# Altium PCB 4CH_PT100_INPUT_ISO.PcbDoc
Units mm, origin at the board's own origin, x right, y up, seen from the top; angles counter-clockwise.
Board outline 70 x 50 mm, 4 copper layers (Top Layer, Layer 1, Layer 2, Bottom Layer), stack 1.58 mm thick; 83 components, 55 nets, 291 pads, 100 vias.
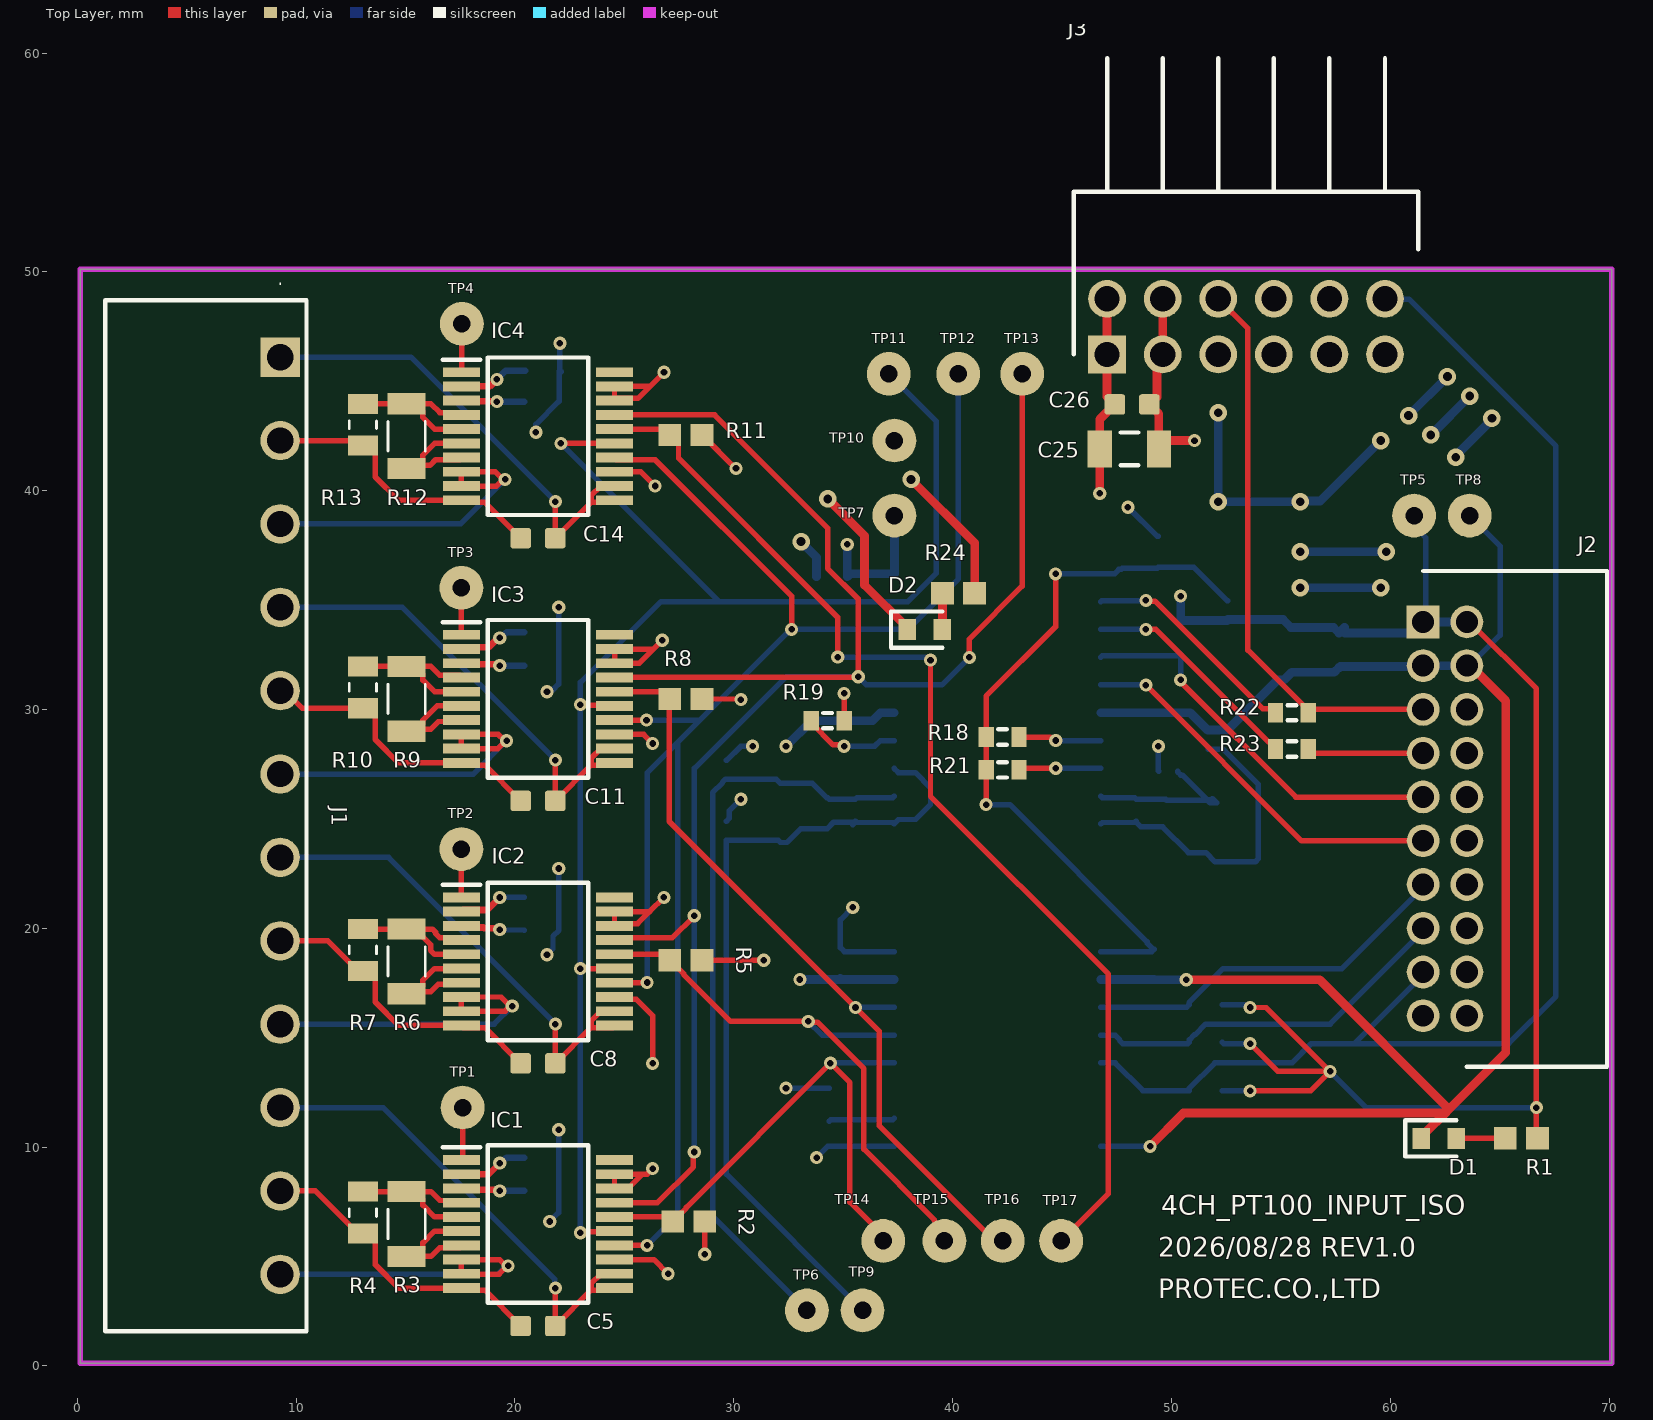
[diagram p0: Top Layer view]
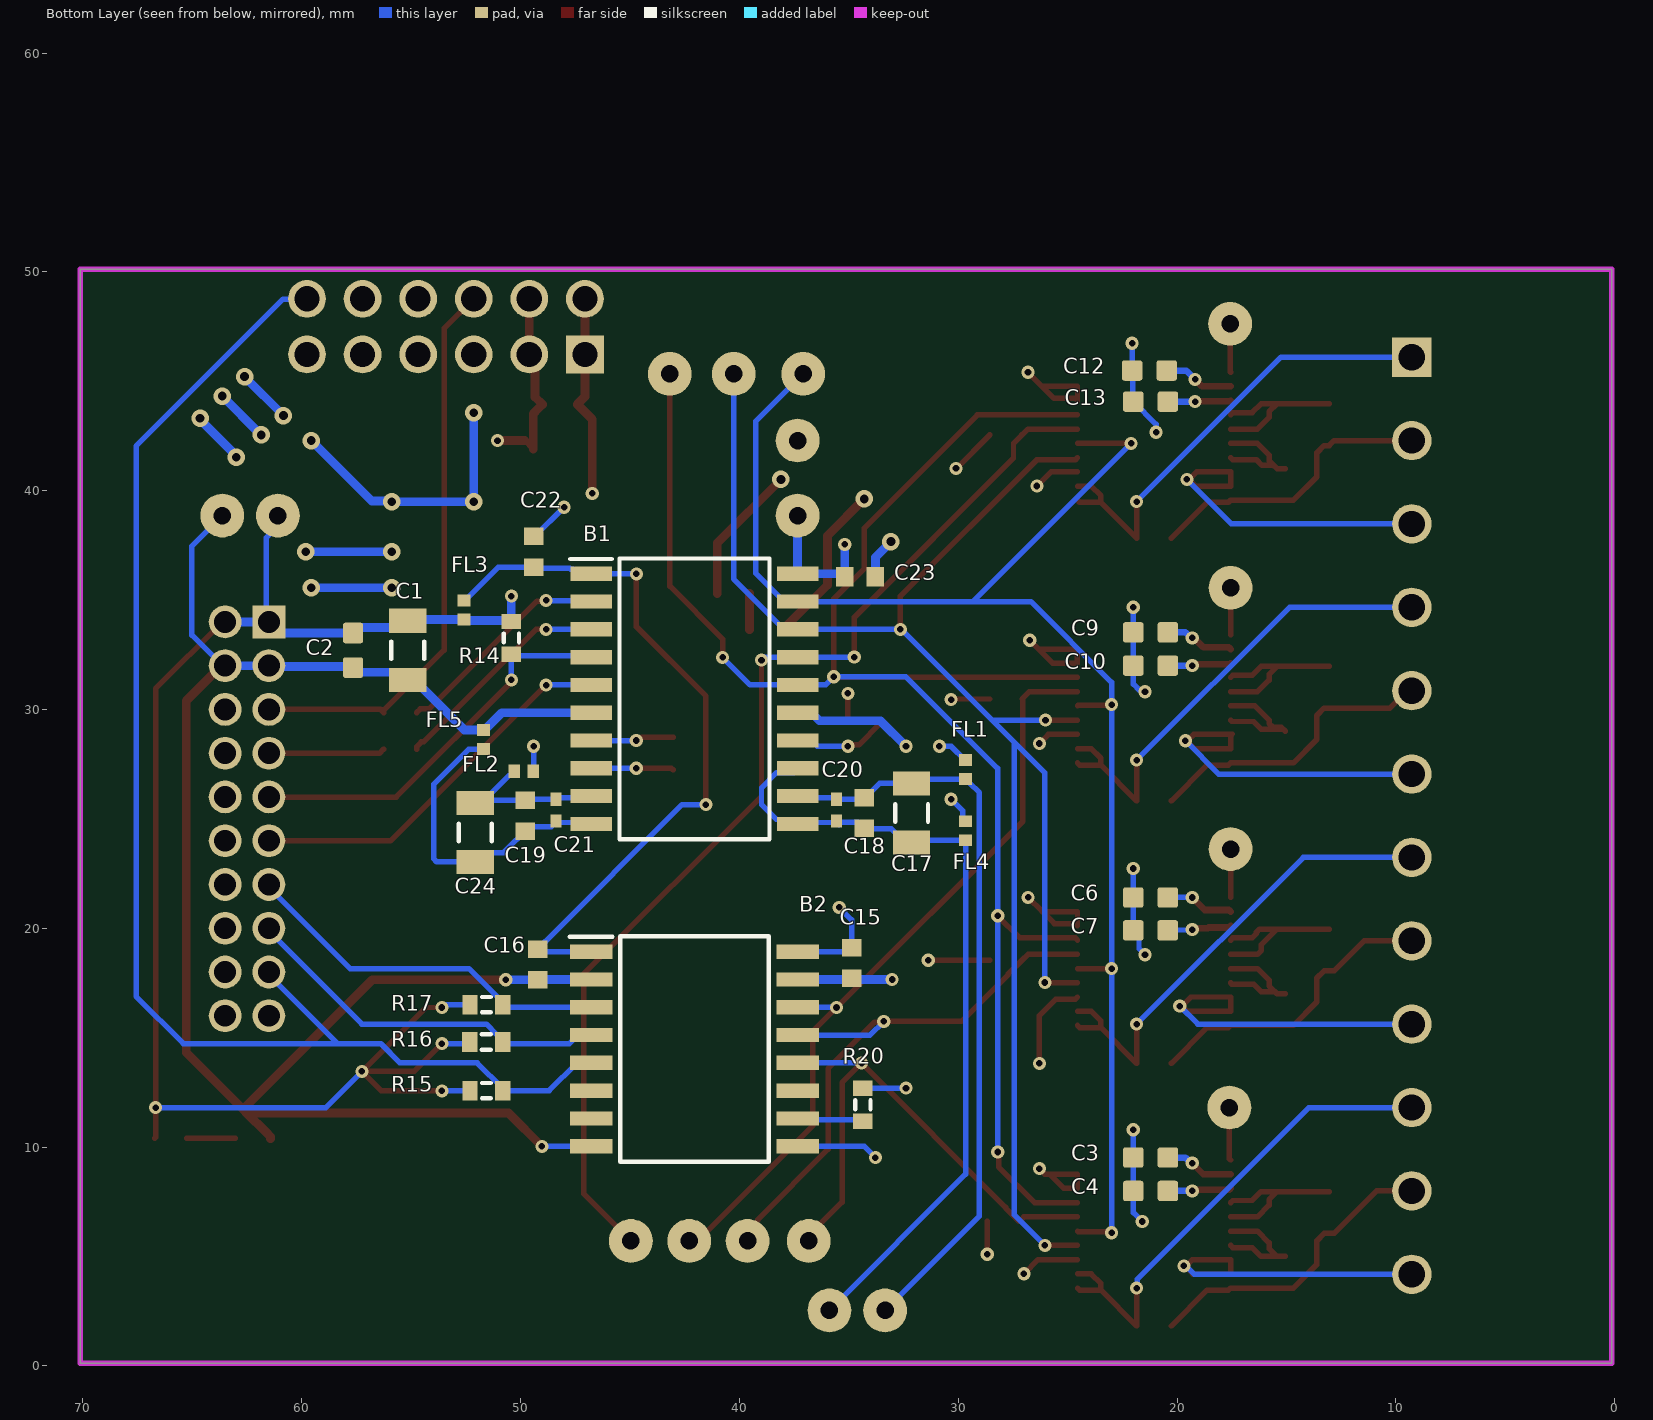
[diagram p1: Bottom Layer view, seen from below]
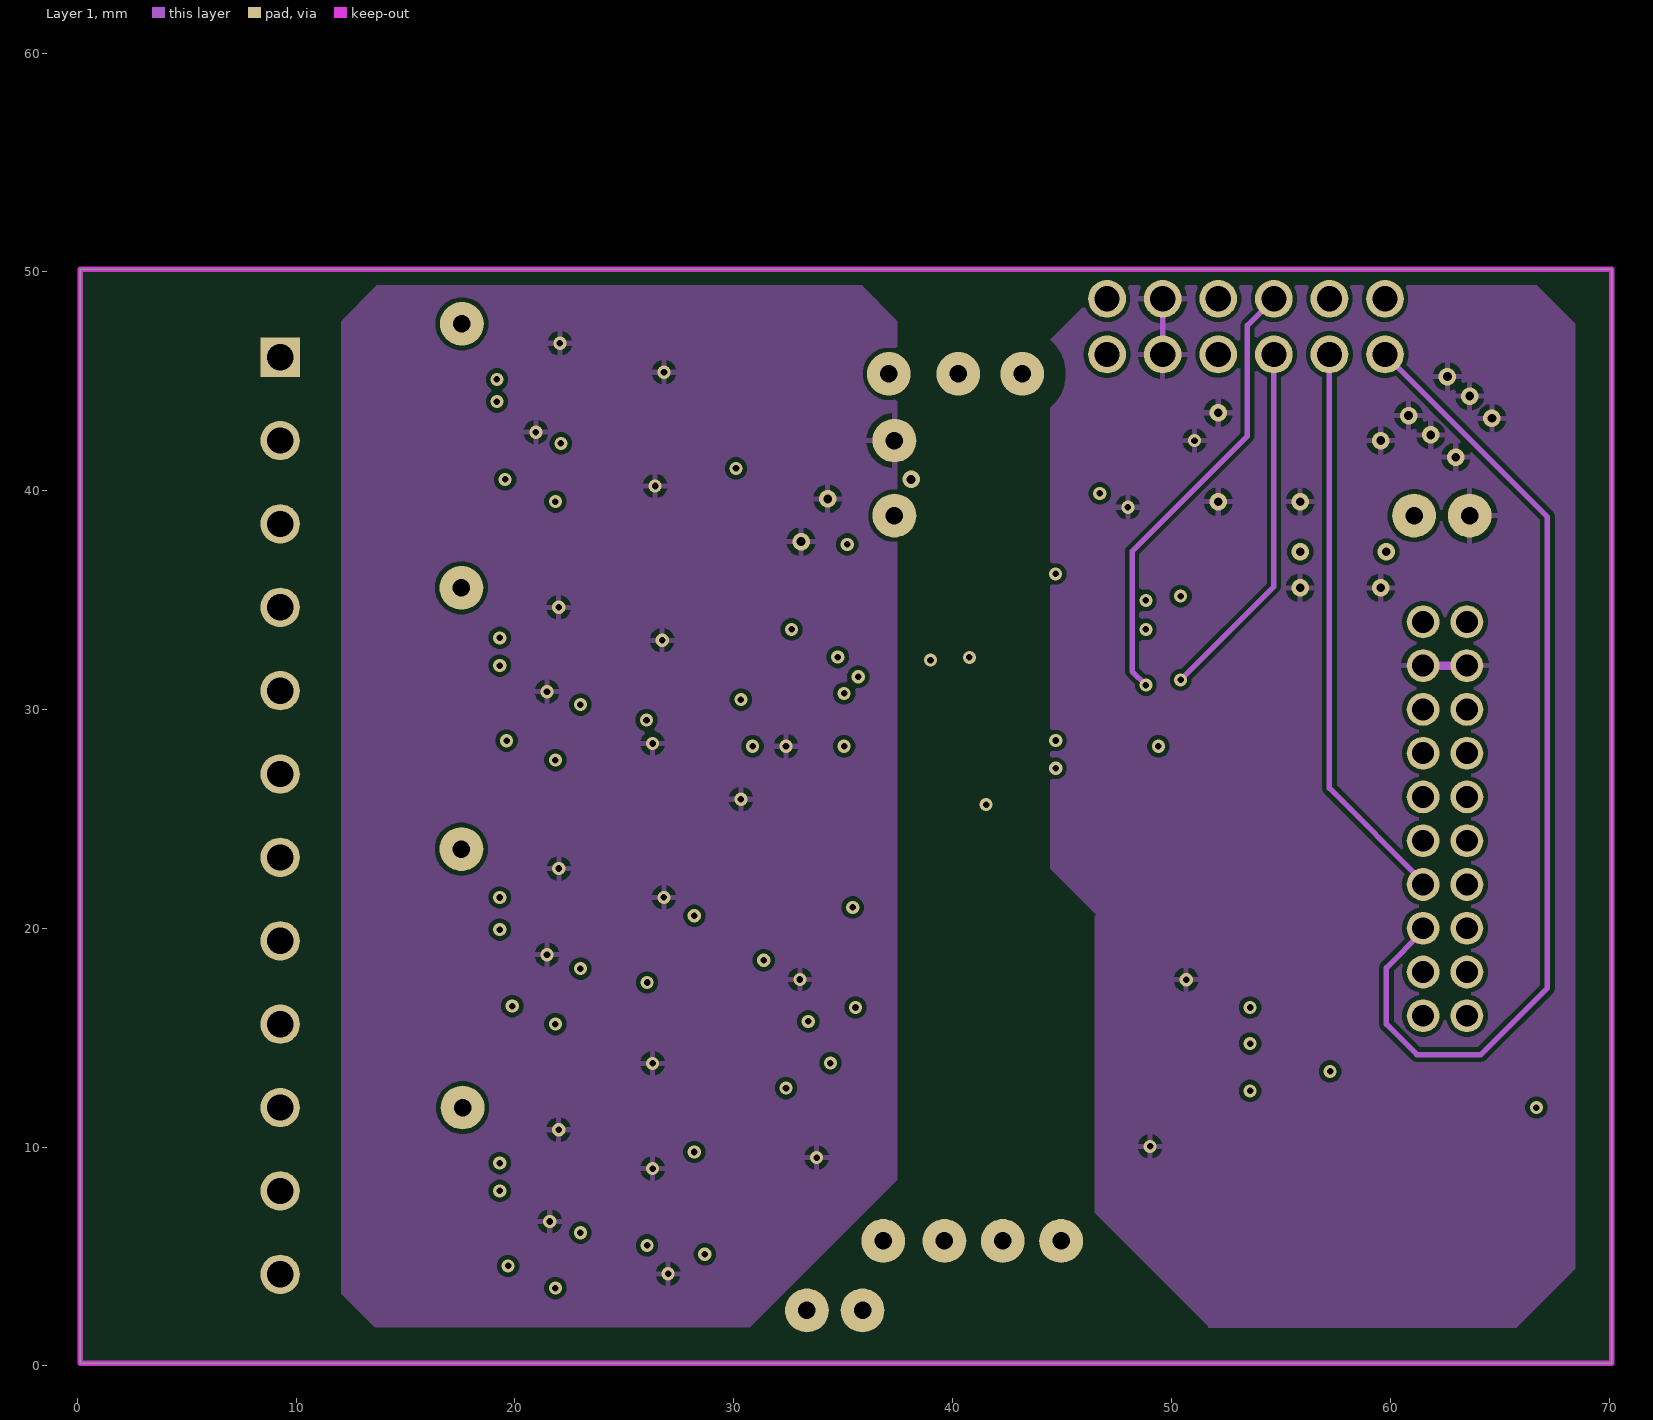
[diagram p2: Layer 1]
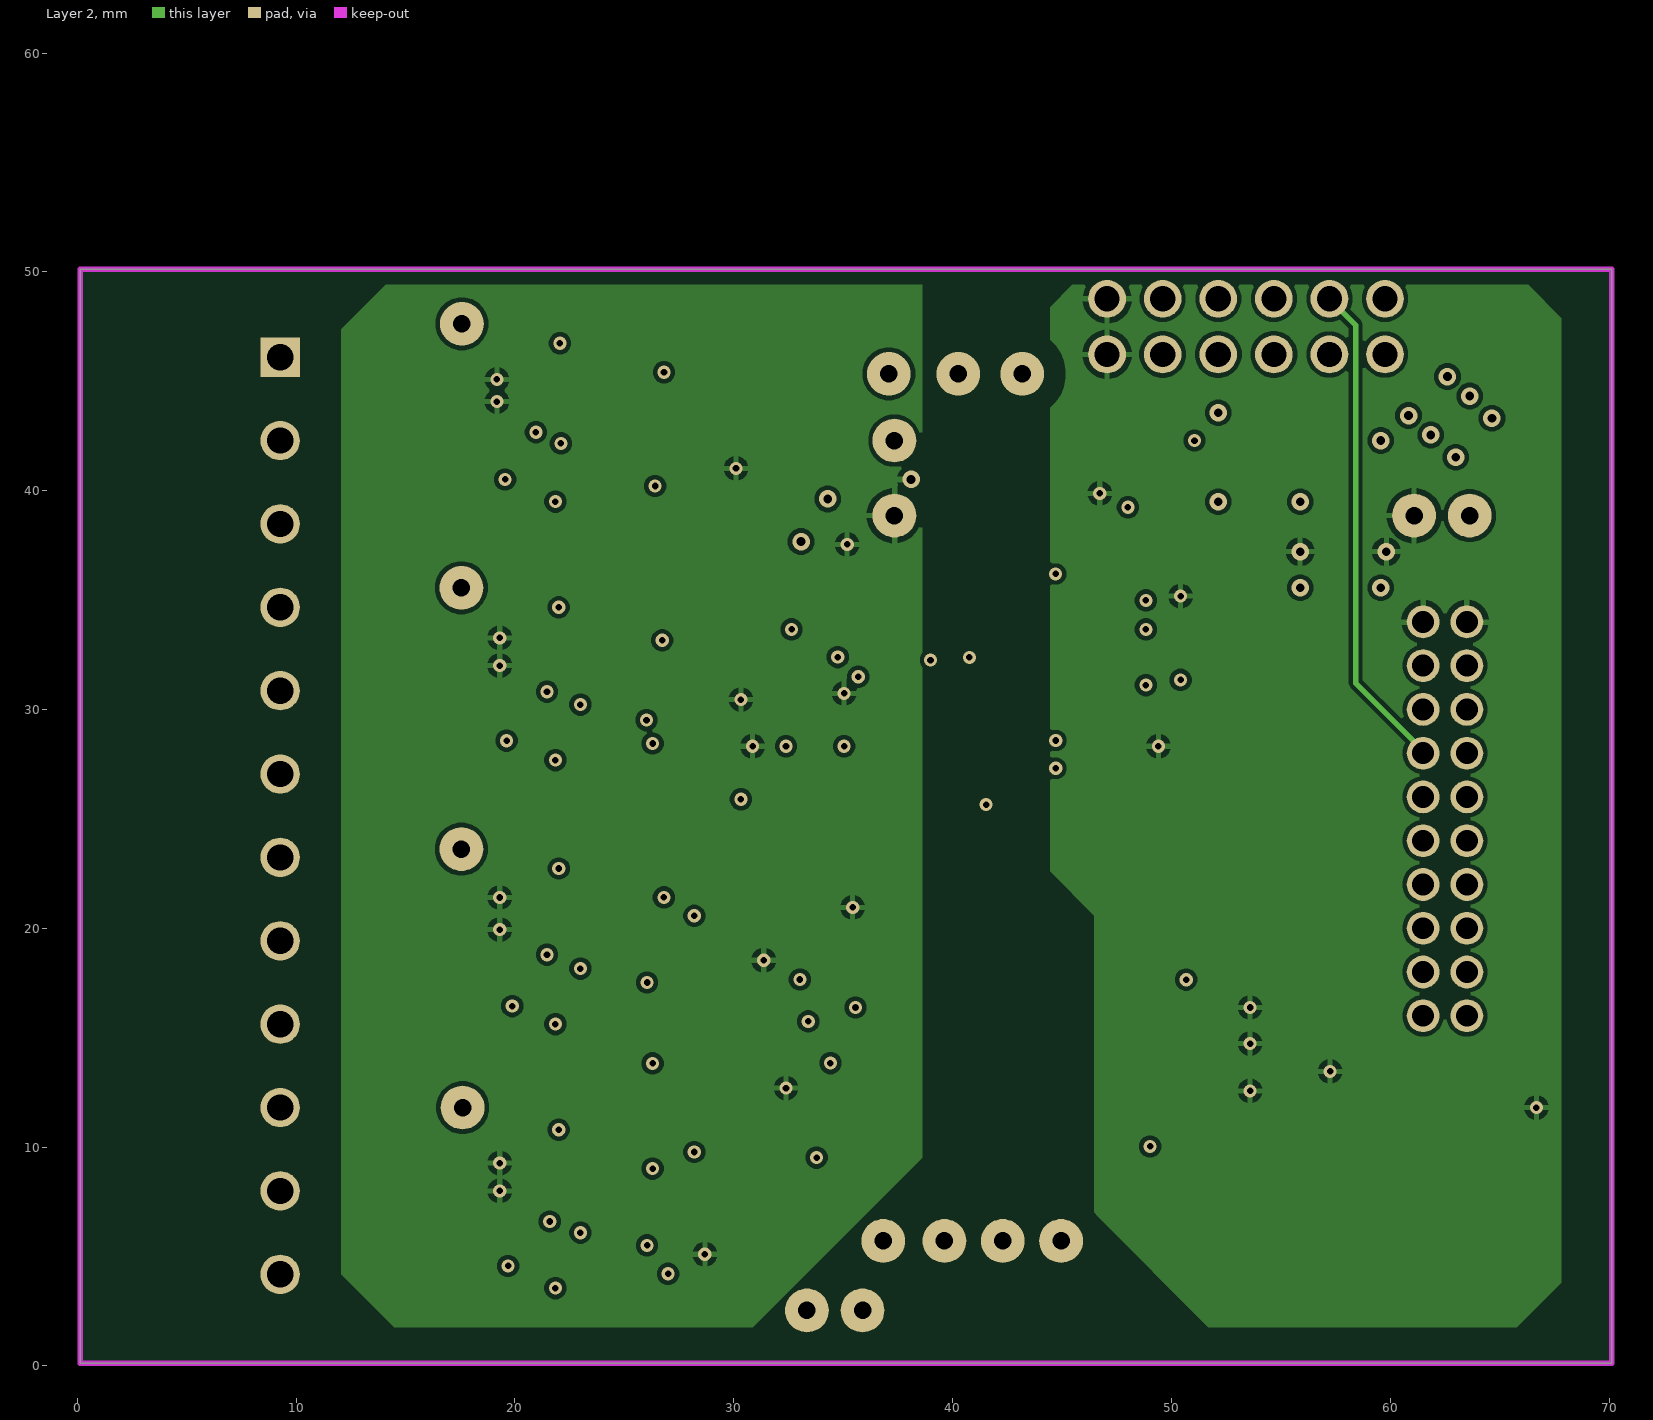
[diagram p3: Layer 2]
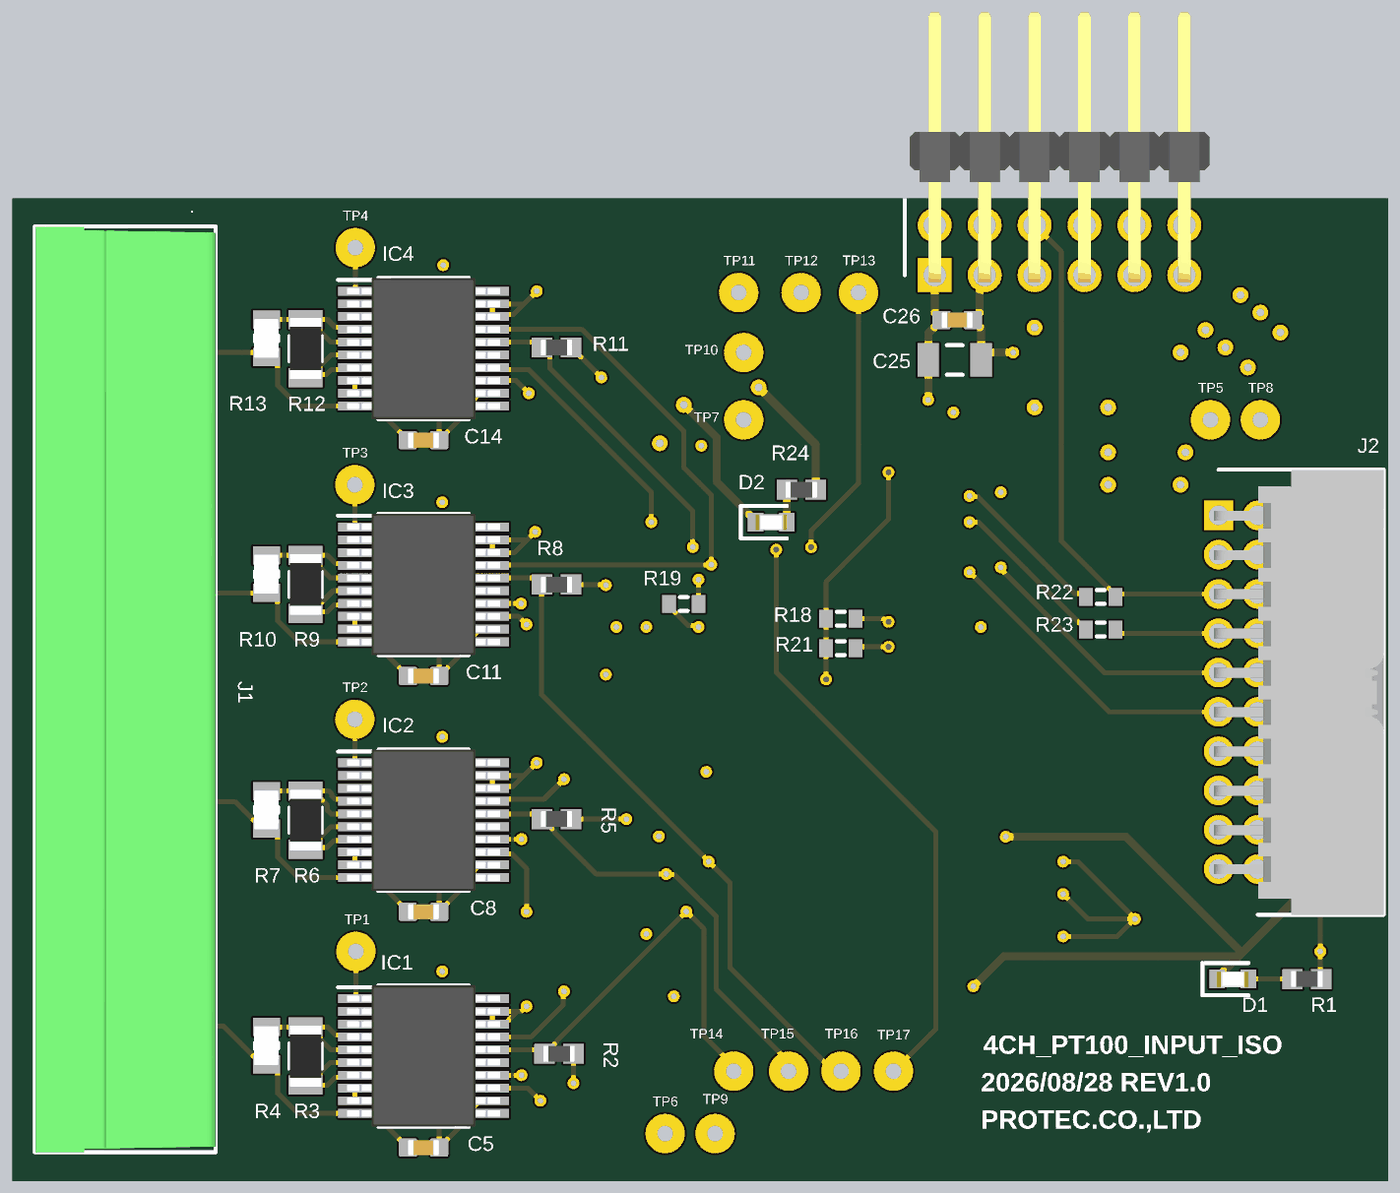
[diagram p4: 3D render of the assembled board from above, using the file's embedded part models]
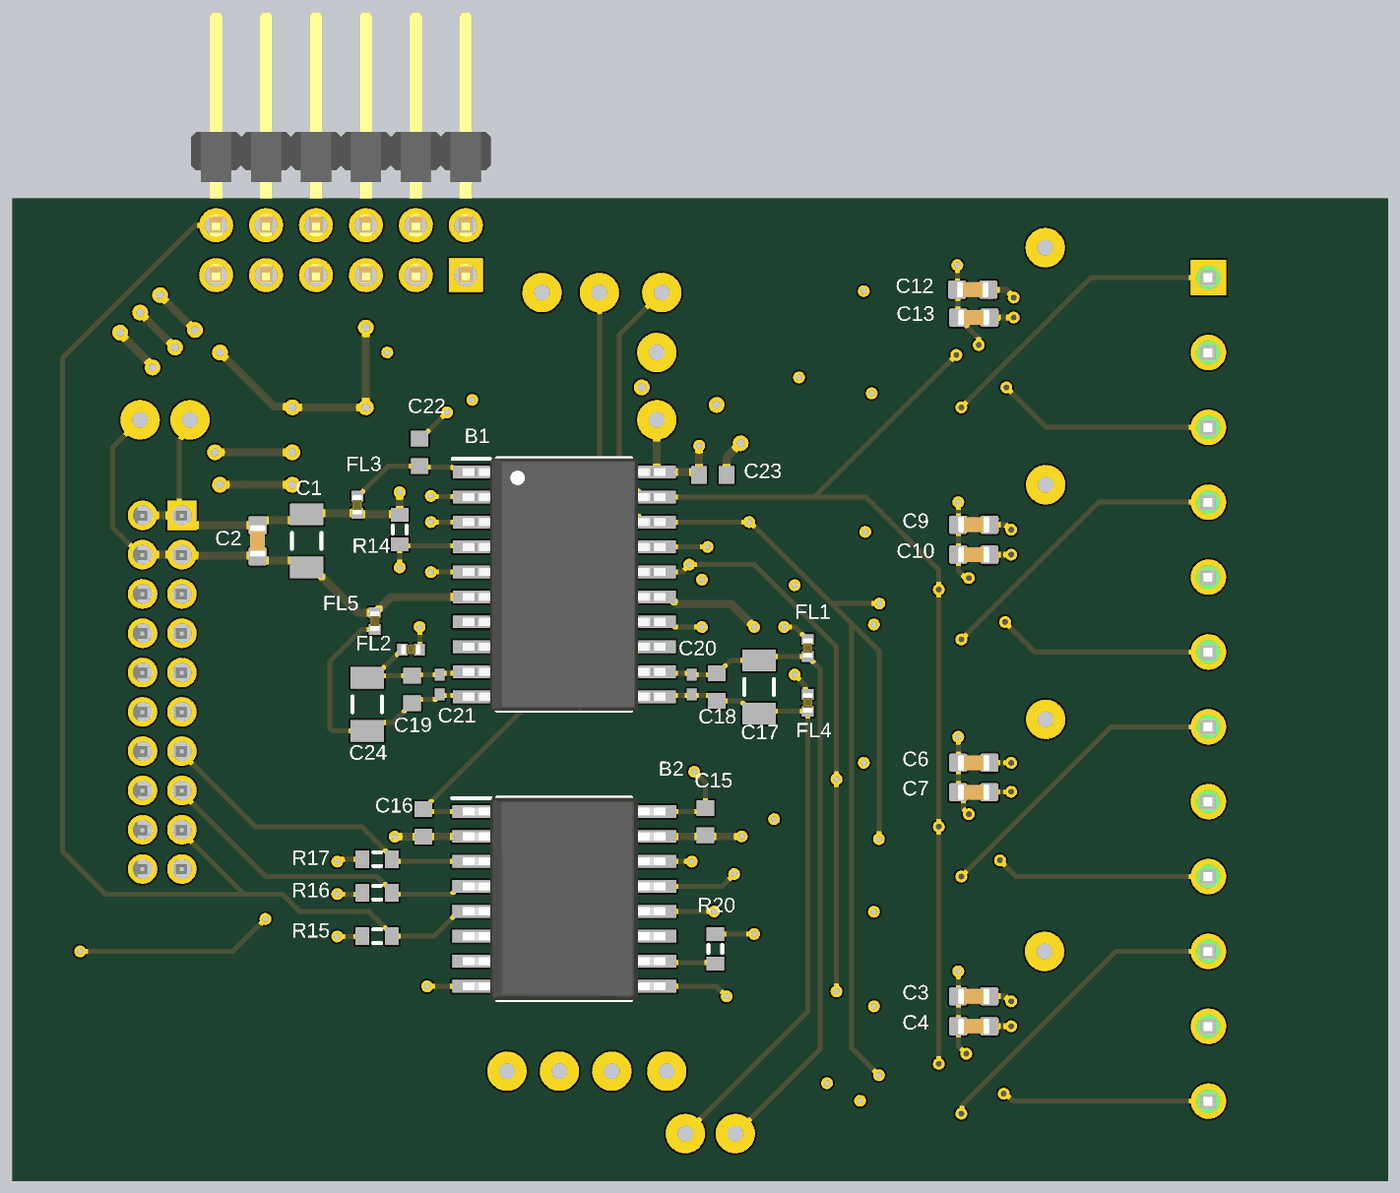
[diagram p5: 3D render of the assembled board from below, using the file's embedded part models]

## Layer stack, top to bottom
Top Solder: solder mask 0.0102, Solder Resist, Dk 3.5
Top Layer: signal copper 0.0356
Dielectric 2: prepreg 0.0711, PP-006, Dk 4.1
Layer 1: signal copper 0.035
Dielectric 1: dielectric 1.2963, FR-4, Dk 4.8
Layer 2: signal copper 0.035
Dielectric 3: prepreg 0.0711, PP-006, Dk 4.1
Bottom Layer: signal copper 0.0356
Bottom Solder: solder mask 0.0102, Solder Resist, Dk 3.5

## Board outline
0.127,0.127 0.127,50.127 70.127,50.127 70.127,0.127

## Design rules (kind name [scope] priority, off if disabled: settings)
BoardOutlineClearance "J2_J3_Overlay_Overhang 4." [(InComponent('J2') Or InComponent('J3')) And (OnLayer('Top Overlay') Or OnLayer('Bottom Overlay'))] p1: gap=0 ignorepadtopadclearanceinfootprint=FALSE
BoardOutlineClearance [All] p2: gap=0.25 ignorepadtopadclearanceinfootprint=FALSE
Clearance Isolation_Clearance_1mm [InNetClass('HOST_DOMAIN') vs InNetClass('ISO_DOMAIN')] p1: gap=1 ignorepadtopadclearanceinfootprint=FALSE
Clearance [All] p2: gap=0.2 ignorepadtopadclearanceinfootprint=FALSE
HoleSize [All] p1: absolutevalues=TRUE maxlimit=1.3 minlimit=0.3 maxpercent=80.000 minpercent=20.000
MinimumAnnularRing [All] p1: minimumring=0.125
MinimumSolderMaskSliver [All] p1: minsoldermaskwidth=0.1
PolygonConnect [All] p1: connectstyle=Relief reliefconductorwidth=0.254 reliefentries=4 polygonreliefangle="90 Angle" airgapwidth=0.254
RoutingVias [All] p1: holewidth=0.3 width=0.6 viastyle="Through Hole" minholewidth=0.25 minwidth=0.5 maxholewidth=0.711 maxwidth=1.27
SilkToSilkClearance [All] p1: silktosilkclearance=0.15
SilkToSolderMaskClearance [IsPad] p1: minsilkscreentomaskgap=0.1 clearancetoexposedcopper=TRUE
SolderMaskExpansion [All] p1: expansion=0.102 istentingtop=FALSE
Width Power_Width [InNetClass('POWER_NETS')] p1: maxlimit=0.8 minlimit=0.25 preferedwidth=0.4
Width Sensor_Input [InNetClass('Sensor_Input')] p2: maxlimit=0.3 minlimit=0.2 preferedwidth=0.25
Width [All] p3: maxlimit=0.5 minlimit=0.15 preferedwidth=0.25
26 further rules are at their usual default settings.

## Classes and differential pairs
net class SENSOR_INPUT: CH1_A_FORCE CH1_A_SENSE CH1_B_RETURN CH2_A_FORCE CH2_A_SENSE CH2_B_RETURN CH3_A_FORCE CH3_A_SENSE CH3_B_RETURN CH4_A_FORCE CH4_A_SENSE CH4_B_RETURN
net class POWER_NETS: 3V3_HOST 3V3_IO_FILT 3V3_ISO 3V3_VDD_FILT GND1_PWR GND2_RAW GND_HOST GND_ISO VISOOUT_RAW
net class ISO_DOMAIN: 3V3_ISO CH1_A_FORCE CH1_A_SENSE CH1_B_RETURN CH2_A_FORCE CH2_A_SENSE CH2_B_RETURN CH3_A_FORCE CH3_A_SENSE CH3_B_RETURN CH4_A_FORCE CH4_A_SENSE CH4_B_RETURN CS1 CS2 CS3 CS4 GND2_RAW GND_ISO NetB1_14 NetB2_10 NetD2_2 NetIC1_1 NetIC1_4 NetIC1_6 NetIC2_1 NetIC2_4 NetIC2_6 NetIC3_1 NetIC3_4 NetIC3_6 NetIC4_1 NetIC4_4 NetIC4_6 SPI_MISO SPI_MOSI SPI_SCLK VISOOUT_RAW
net class HOST_DOMAIN: 3V3_HOST 3V3_IO_FILT 3V3_VDD_FILT CS1_N_HOST CS2_N_HOST CS3_N_HOST CS4_N_HOST GND1_PWR GND_HOST MOSI NetB1_7 NetB1_8 NetD1_2 SCLK SPI_MISO_HOST SPI_MOSI_HOST SPI_SCLK_HOST
component class TestPoint: TP5 TP6 TP7 TP8 TP9 TP10 TP11 TP12 TP13 TP14 TP15 TP16 TP17
component class ISOLATION: B1 B2 C15 C16 C17 C18 C19 C20 C21 C22 C23 C24 D2 FL1 FL2 FL3 FL4 FL5 R14 R15 R16 R17 R18 R19 R20 R21 R24
component class Connectors: C1 C2 C25 C26 D1 J1 J2 J3 R1 R22 R23
component class CH3_CH4: C9 C10 C11 C12 C13 C14 IC3 IC4 R8 R9 R10 R11 R12 R13 TP3 TP4
component class CH1_CH2: C3 C4 C5 C6 C7 C8 IC1 IC2 R2 R3 R4 R5 R6 R7 TP1 TP2

## Components (designator, comment, footprint, x,y, rotation, side; value= is the part's Value field where it differs from the comment)
B1 "ISOW7741DFMR" SOIC127P1030X355-20N 42.05,30.488 r180 bottom
B2 "ISO7730DWR" SOIC127P1030X265-16N 42.05,14.488 r180 bottom
C1 "10µF, 25V, 1206" C1206 55.153,32.706 r90 bottom value=10uF
C2 "100nF, 25V, 0603" CAPC1608X90N 57.653,32.706 r90 bottom
C3 "100nF, 25V, 0603" CAPC1608X90N 21.209,9.525 r180 bottom
C4 "100nF, 25V, 0603" CAPC1608X90N 21.209,8.001 r180 bottom
C5 "100nF, 25V, 0603" CAPC1608X90N 21.05,1.828 r180 top
C6 "100nF, 25V, 0603" CAPC1608X90N 21.212,21.41 r180 bottom
C7 "100nF, 25V, 0603" CAPC1608X90N 21.212,19.91 r180 bottom
C8 "100nF, 25V, 0603" CAPC1608X90N 21.05,13.828 r180 top
C9 "100nF, 25V, 0603" CAPC1608X90N 21.209,33.528 r180 bottom
C10 "100nF, 25V, 0603" CAPC1608X90N 21.209,32.004 r180 bottom
C11 "100nF, 25V, 0603" CAPC1608X90N 21.05,25.828 r180 top
C12 "100nF, 25V, 0603" CAPC1608X90N 21.26,45.488 r180 bottom
C13 "100nF, 25V, 0603" CAPC1608X90N 21.209,44.069 r180 bottom
C14 "100nF, 25V, 0603" CAPC1608X90N 21.05,37.828 r180 top
C15 "0.1uF, 1608" 1608[0603] 34.866,18.415 r90 bottom value=0.1uF
C16 "0.1uF, 1608" 1608[0603] 49.217,18.353 r90 bottom value=0.1uF
C17 "10uF, 1206" C1206 32.131,25.273 r90 bottom value=10uF
C18 "1uF, 1608" 1608[0603] 34.29,25.273 r90 bottom value=1uF
C19 "1uF, 1608" 1608[0603] 49.784,25.146 r90 bottom value=1uF
C20 "10nF, 0402" 0402 35.56,25.4 r90 bottom value=10nF
C21 "10nF, 0402" 0402 48.387,25.4 r90 bottom value=10nF
C22 "0.1uF, 1608" 1608[0603] 49.403,37.211 r270 bottom value=0.1uF
C23 "0.1uF, 1608" 1608[0603] 34.482,36.068 r0 bottom value=0.1uF
C24 "10uF, 1206" C1206 52.07,24.384 r90 bottom value=10uF
C25 "10µF, 25V, 1206" C1206 48.074,41.91 r180 top value=10uF
C26 "100nF, 25V, 0603" CAPC1608X90N 48.201,43.942 r180 top
D1 "Green LED, 0603" LEDC1608X75N 62.225,10.401 r0 top
D2 "Green LED, 0603" LEDC1608X75N 38.735,33.655 r0 top
FL1 "BLM15EX331SN1D" BEADC1005X55N 29.659,27.254 r90 bottom
FL2 "BLM15EX331SN1D" BEADC1005X55N 49.852,27.178 r0 bottom
FL3 "BLM15EX331SN1D" BEADC1005X55N 52.578,34.544 r90 bottom
FL4 "BLM15EX331SN1D" BEADC1005X55N 29.659,24.46 r90 bottom
FL5 "BLM15EX331SN1D" BEADC1005X55N 51.689,28.626 r270 bottom
IC1 "MAX31865AAP+" SOP65P778X199-20N 21.05,6.488 r0 top
IC2 "MAX31865AAP+" SOP65P778X199-20N 21.05,18.488 r0 top
IC3 "MAX31865AAP+" SOP65P778X199-20N 21.05,30.488 r0 top
IC4 "MAX31865AAP+" SOP65P778X199-20N 21.05,42.488 r0 top
J1 "1803374" 1803374 9.271,46.101 r270 top
J2 "87833-2020" SHDRRA20W55P200_2X10_2265X640X630P 61.5,34.004 r270 top
J3 "M20-9950645" HDRRA12W66P254_2X6_1524X254X508P 47.058,46.228 r0 top
R1 "1.5K, 0603" RESC1607X60N 65.99,10.401 r180 top
R2 "10K, 0603" RESC1607X60N 27.94,6.604 r0 top
R3 "400, 1206" RESC3116X65N 15.05,6.488 r270 top
R4 "10M, 0805" *RESC2012X60N 13.05,7.013 r270 top
R5 "10K, 0603" RESC1607X60N 27.813,18.542 r0 top
R6 "400, 1206" RESC3116X65N 15.05,18.488 r270 top
R7 "10M, 0805" *RESC2012X60N 13.05,19.013 r270 top
R8 "10K, 0603" RESC1607X60N 27.813,30.48 r0 top
R9 "400, 1206" RESC3116X65N 15.05,30.488 r270 top
R10 "10M, 0805" *RESC2012X60N 13.05,31.013 r270 top
R11 "10K, 0603" RESC1607X60N 27.813,42.545 r0 top
R12 "400, 1206" RESC3116X65N 15.05,42.488 r270 top
R13 "10M, 0805" *RESC2012X60N 13.05,43.013 r270 top
R14 "10k, 1608" J1-0603 50.419,33.274 r90 bottom value=10k
R15 "10k, 1608" J1-0603 51.562,12.583 r0 bottom value=10k
R16 "10k, 1608" J1-0603 51.564,14.805 r0 bottom value=10k
R17 "10k, 1608" J1-0603 51.562,16.51 r0 bottom value=10k
R18 "10k, 1608" J1-0603 42.28,28.742 r0 top value=10k
R19 "10k, 1608" J1-0603 34.29,29.491 r0 top value=10k
R20 "10k, 1608" J1-0603 34.358,11.938 r90 bottom value=10k
R21 "10k, 1608" J1-0603 42.28,27.242 r0 top value=10k
R22 "33R, 1608" J1-0603 55.503,29.853 r0 top value=33R
R23 "33R, 1608" J1-0603 55.503,28.194 r0 top value=33R
R24 "1.5K, 0603" RESC1607X60N 40.27,35.306 r180 top
TP1 "TEST POINT" TESTPOINT 17.608,11.811 r0 top
TP2 "TEST POINT" TESTPOINT 17.552,23.622 r90 top
TP3 "TEST POINT" TESTPOINT 17.552,35.56 r90 top
TP4 "TEST POINT" TESTPOINT 17.574,47.625 r90 top
TP5 "TEST POINT" TESTPOINT 61.087,38.862 r90 top
TP6 "TEST POINT" TESTPOINT 33.342,2.54 r90 top
TP7 "TEST POINT" TESTPOINT 37.338,38.862 r90 top
TP8 "TEST POINT" TESTPOINT 63.627,38.862 r90 top
TP9 "TEST POINT" TESTPOINT 35.882,2.54 r90 top
TP10 "TEST POINT" TESTPOINT 37.338,42.291 r90 top
TP11 "TEST POINT" TESTPOINT 37.084,45.339 r90 top
TP12 "TEST POINT" TESTPOINT 40.259,45.339 r90 top
TP13 "TEST POINT" TESTPOINT 43.18,45.339 r90 top
TP14 "TEST POINT" TESTPOINT 36.83,5.715 r90 top
TP15 "TEST POINT" TESTPOINT 39.624,5.715 r90 top
TP16 "TEST POINT" TESTPOINT 42.291,5.715 r90 top
TP17 "TEST POINT" TESTPOINT 44.958,5.715 r90 top

## Footprints (in the part's own frame and the unit in brackets; to place one, negate y for a bottom-side part, rotate by r counter-clockwise, add the part's x,y. Pads: shape width x height; smd on the part's side, far side on the other; paste and mask are expansions set on the pad)
0402 [mm] "Chip Capacitor, Body 1.0x0.5mm, IPC High Density"
  rect 0.6x0.5 smd: 1(-0.5,0) 2(0.5,0)
  body extent -0.55,-0.3 0.55,0.3, height 1.3
1608[0603] [mm] "Chip Capacitor, Body 1.6x0.8mm, IPC High Density"
  rect 0.8x0.9 smd: 1(-0.7,0) 2(0.7,0)
  body extent -0.87,-0.48 0.87,0.48, height 1.3
1803374 [mm]
  rect 1.8x1.8 hole 1.2: 1(0,0)
  round 1.8 hole 1.2: 2(3.81,0) 3(7.62,0) 4(11.43,0) 5(15.24,0) 6(19.05,0) 7(22.86,0) 8(26.67,0) 9(30.48,0) 10(34.29,0) 11(38.1,0) 12(41.91,0)
  silkscreen extent -3.38,-8 44.51,1.2, body extent -2.59,-7.98 44.52,1.22, height 7.25
*RESC2012X60N [mm]
  rect 0.92x1.38 smd: 1(-0.955,0) 2(0.955,0)
  silkscreen extent -0.18,-0.63 0.18,0.63, body extent -1,-0.62 1,0.63, height 0.6
BEADC1005X55N [mm]
  rect 0.54x0.6 smd: 1(-0.432,0) 2(0.432,0)
  body extent -0.5,-0.25 0.5,0.25, height 0.55
C1206 [mm] "Chip Capacitor, Body 3.2x1.6mm, IPC High Density"
  rect 1.1x1.7 smd: 1(-1.35,0) 2(1.35,0)
  silkscreen extent -0.4,-0.75 0.4,0.75, body extent -1.7,-0.9 1.7,0.9, height 1.3
CAPC1608X90N [mm]
  rrect25% 0.94x0.93 smd: 1(-0.79,0) 2(0.79,0)
  body extent -0.8,-0.4 0.8,0.4, height 0.9
HDRRA12W66P254_2X6_1524X254X508P [mm]
  rect 1.725x1.725 / inner round 1.725 / far side rect 1.725x1.725 hole 1.15: 1(0,0)
  round 1.725 hole 1.15: 2(0,2.54) 3(2.54,0) 4(2.54,2.54) 5(5.08,0) 6(5.08,2.54) 7(7.62,0) 8(7.62,2.54) 9(10.16,0) 10(10.16,2.54) 11(12.7,0) 12(12.7,2.54)
  silkscreen extent -1.52,0 14.22,13.54, body extent -1.27,-0.38 13.97,13.38, height 5.04
J1-0603 [mm] "Chip Resistor, Body 1.6x0.8mm, IPC High Density"
  rect 0.7x0.9 smd: 1(-0.75,0) 2(0.75,0)
  silkscreen extent -0.2,-0.35 0.2,0.35, body extent -0.85,-0.48 0.85,0.48, height 0.9
LEDC1608X75N [mm]
  rect 0.8x0.95 smd: 1(-0.8,0) 2(0.8,0)
  silkscreen extent -1.55,-0.82 0.8,0.82, body extent -0.8,-0.41 0.8,0.39, height 0.75
RESC1607X60N [mm]
  rect 1.04x1.02 smd: 1(-0.735,0) 2(0.735,0)
  body extent -0.8,-0.4 0.8,0.4, height 0.55
RESC3116X65N [mm]
  rect 0.97x1.73 smd paste+0 mask+0.102: 1(-1.48,0) 2(1.48,0)
  silkscreen extent -0.67,-0.85 0.67,0.85, body extent -1.55,-0.8 1.55,0.8, height 0.65
SHDRRA20W55P200_2X10_2265X640X630P [mm]
  rect 1.5x1.5 / inner round 1.5 / far side rect 1.5x1.5 hole 1: 1(0,0)
  round 1.5 hole 1: 2(0,2) 3(2,0) 4(2,2) 5(4,0) 6(4,2) 7(6,0) 8(6,2) 9(8,0) 10(8,2) 11(10,0) 12(10,2) 13(12,0) 14(12,2) 15(14,0) 16(14,2) 17(16,0) 18(16,2) 19(18,0) 20(18,2)
  silkscreen extent -2.32,0 20.33,8.4, body extent -2.31,-0.24 20.34,8.41, height 6.35
SOIC127P1030X265-16N [mm]
  rect 1.95x0.65 smd: 1(-4.725,4.445) 2(-4.725,3.175) 3(-4.725,1.905) 4(-4.725,0.635) 5(-4.725,-0.635) 6(-4.725,-1.905) 7(-4.725,-3.175) 8(-4.725,-4.445) 9(4.725,-4.445) 10(4.725,-3.175) 11(4.725,-1.905) 12(4.725,-0.635) 13(4.725,0.635) 14(4.725,1.905) 15(4.725,3.175) 16(4.725,4.445)
  silkscreen extent -5.7,-5.15 3.4,5.15, body extent -5.17,-5.15 5.17,5.15, height 2.59
SOIC127P1030X355-20N [mm]
  rect 1.9x0.65 smd: 1(-4.725,5.715) 2(-4.725,4.445) 3(-4.725,3.175) 4(-4.725,1.905) 5(-4.725,0.635) 6(-4.725,-0.635) 7(-4.725,-1.905) 8(-4.725,-3.175) 9(-4.725,-4.445) 10(-4.725,-5.715) 11(4.725,-5.715) 12(4.725,-4.445) 13(4.725,-3.175) 14(4.725,-1.905) 15(4.725,-0.635) 16(4.725,0.635) 17(4.725,1.905) 18(4.725,3.175) 19(4.725,4.445) 20(4.725,5.715)
  silkscreen extent -5.68,-6.42 3.42,6.42, body extent -5.15,-6.42 5.15,6.41, height 3.55
SOP65P778X199-20N [mm]
  rect 1.705x0.45 smd: 1(-3.498,2.925) 2(-3.498,2.275) 3(-3.498,1.625) 4(-3.498,0.975) 5(-3.498,0.325) 6(-3.498,-0.325) 7(-3.498,-0.975) 8(-3.498,-1.625) 9(-3.498,-2.275) 10(-3.498,-2.925) 11(3.498,-2.925) 12(3.498,-2.275) 13(3.498,-1.625) 14(3.498,-0.975) 15(3.498,-0.325) 16(3.498,0.325) 17(3.498,0.975) 18(3.498,1.625) 19(3.498,2.275) 20(3.498,2.925)
  silkscreen extent -4.35,-3.6 2.29,3.6, body extent -3.89,-3.6 3.89,3.6, height 1.99
TESTPOINT [mm]
  round 2 hole 0.8: 1(0,0)

## Part data
B1: "ISOW7741 Quad-Channel Digital Isolator with Integrated Low-Emissions, Low-Noise DC-DC Converter", Manufacturer_Name="Texas Instruments", Mouser Part Number=595-ISOW7741DFMR, Datasheet Link=https://www.ti.com/lit/ds/symlink/isow7741.pdf?ts=1638340822813&ref_url=https%253A%252F%252Fwww.ti.com%252Fproduct%252FISOW7741, Geometry.Height=3.55mm, Manufacturer_Part_Number=ISOW7741DFMR, Mouser Price/Stock=https://www.mouser.co.uk/ProductDetail/Texas-Instruments/ISOW7741DFMR?qs=TCDPyi3sCW2lvMJ%252B%2FuKOng%3D%3D
B2: "Integrated Circuit", Manufacturer_Name="Texas Instruments", Mouser Part Number=595-ISO7730DWR, Arrow Part Number=ISO7730DWR, Arrow Price/Stock=https://www.arrow.com/en/products/iso7730dwr/texas-instruments?region=nac, Datasheet Link=http://www.ti.com/lit/gpn/iso7730, Height=2.65mm, Manufacturer_Part_Number=ISO7730DWR, Mouser Price/Stock=https://www.mouser.co.uk/ProductDetail/Texas-Instruments/ISO7730DWR?qs=d557%2FRYZ0%2FpU9%252BX01Fh6Sw%3D%3D
C1 C25: library part "Cap Semi", "10µF, 25V, X7R, ±5%, 1206 / C1206C106J3RACTU", LatestRevisionDate=29-May-2009, LatestRevisionNote="IPC-7351 Footprint Added.", PackageDescription="Chip Capacitor", PackageReference=C1206, Published=8-Jun-2000, Publisher="Altium Limited"
C2 C3 C4 C5 C6 C7 C8 C9 C10 C11 C12 C13 C14 C26: library part CL10B104KA8VPJC, "Multilayer Ceramic Capacitors MLCC - SMD/SMT", Package="SMD-2 Samsung", Check_prices=https://www.snapeda.com/parts/CL10B104KA8VPJC/Samsung/view-part/?ref=eda, MF="Samsung Electro-Mechanics", MP=CL10B104KA8VPJC, SnapEDA_Link=https://www.snapeda.com/parts/CL10B104KA8VPJC/Samsung/view-part/?ref=snap
C15 C16 C18 C19 C20 C21 C22 C23: library part "Cap Semi", "Capacitor (Semiconductor SIM Model)", LatestRevisionDate=29-May-2009, LatestRevisionNote="IPC-7351 Footprint Added.", PackageDescription="Chip Capacitor", PackageReference=C1206, Published=8-Jun-2000, Publisher="Altium Limited"
C17 C24: library part "Cap Semi", "C1206C106J3RACTU", LatestRevisionDate=29-May-2009, LatestRevisionNote="IPC-7351 Footprint Added.", PackageDescription="Chip Capacitor", PackageReference=C1206, Published=8-Jun-2000, Publisher="Altium Limited"
D1 D2: library part KPH-1608SGC, "Green Chip LED 1.6x0.8mm Kingbright KPH-1608SGC, 603 Series Green LED, 568 nm 1608 (0603), Rectangle Lens SMD package", Manufacturer_Name=Kingbright, Datasheet Link=https://kingbright-europe.de/_daten/2013-2015KBE-P005-023-SMD-LED.pdf, Geometry.Height=0.75mm, Manufacturer_Part_Number=KPH-1608SGC
FL1 FL2 FL3 FL4 FL5: "330 Ohms @ 100 MHz 1 Power, Signal Line Ferrite Bead 0402 (1005 Metric) 1.1A 205mOhm", Package="1005 Taiyo Yuden", Check_prices=https://www.snapeda.com/parts/BLM15EX331SN1D/Murata/view-part/?ref=eda, MF=Murata, MP=BLM15EX331SN1D, SnapEDA_Link=https://www.snapeda.com/parts/BLM15EX331SN1D/Murata/view-part/?ref=snap
IC1 IC2 IC3 IC4: "Integrated Circuit", Manufacturer_Name="Analog Devices", Mouser Part Number=700-MAX31865AAP+, Arrow Part Number=MAX31865AAP+, Arrow Price/Stock=https://www.arrow.com/en/products/max31865aap/analog-devices.html?utm_currency=USD&region=europe, Datasheet Link=https://www.analog.com/MAX31865/datasheet, Height=1.99mm, Manufacturer_Part_Number=MAX31865AAP+, Mouser Price/Stock=https://www.mouser.co.uk/ProductDetail/Analog-Devices-Maxim-Integrated/MAX31865AAP%2b?qs=PVVDbbWpW3IB0xqHe0DjLw%3D%3D
J1: "MC 1,5/12-G-3,81 - PCB headers, nominal cross section: 1.5 mm<sup>2</sup>, color: green, nominal current: 8 A, rated voltage (III/2): 160 V, contact surface: Sn, contact connection type: Pin, number of potentials: 12, number of rows: 1, number of positions: 12, number of connections: 12, product range: MC 1,5/..-G, pitch: 3.81 mm, screw head form: L Slotted, mounting: Wave soldering, pin layout: Linear pinning, solder pin [P]: 3.4 mm, number of solder pins per potential: 1, plug-in system: COMBICON MC 1,5,", Manufacturer_Name="Phoenix Contact", Mouser Part Number=651-1803374, Arrow Part Number=1803374, Arrow Price/Stock=https://www.arrow.com/en/products/1803374/phoenix-contact?utm_currency=USD&region=nac, Datasheet Link=https://www.phoenixcontact.com/en-us/products/pcb-header-mc-1512-g-381-1803374?type=pdf, Geometry.Height=8.25mm, Manufacturer_Part_Number=1803374, Mouser Price/Stock=https://www.mouser.co.uk/ProductDetail/Phoenix-Contact/1803374?qs=%2FbRkJSLTVS9mX%2FTOf8pTQA%3D%3D
J2: "Milli-Grid 2.0mm Header rightangle 20way Molex 87833 Series, 2mm Pitch 20 Way 2 Row Right Angle PCB Header, Solder Termination, 2A", Manufacturer_Name=Molex, Mouser Part Number=538-87833-2020, Datasheet Link=https://www.molex.com/pdm_docs/sd/878332020_sd.pdf, Geometry.Height=6.3mm, Manufacturer_Part_Number=87833-2020, Mouser Price/Stock=https://www.mouser.co.uk/ProductDetail/Molex/87833-2020?qs=9Wl4wMk6NjqIn8s9c3rdaw%3D%3D
J3: "M20: 6+6 Pos Plug DIL Right-Angle 3mm THT Connector 6.1mm pin Gold", Manufacturer_Name=Harwin, Mouser Part Number=855-M20-9950645, Datasheet Link=https://content.harwin.com/m/2bbbbcb217f49919/original/DRG-00474-Technical-Drawing-Datasheet-M20-995-pdf.pdf, Geometry.Height=5.08mm, Manufacturer_Part_Number=M20-9950645, Mouser Price/Stock=https://www.mouser.co.uk/ProductDetail/Harwin/M20-9950645?qs=WS5Jv%252B%252Bx1qVrnrdlGO%252BcnA%3D%3D
R1 R24: library part RC0603FR-071K5L, "1.5 kOhms Â±1% 0.1W, 1/10W Chip Resistor 0603 (1608 Metric) Moisture Resistant Thick Film", Package="0603 Yageo", Check_prices=https://www.snapeda.com/parts/RC0603FR-071K5L/Yageo/view-part/?ref=eda, MF=Yageo, MP=RC0603FR-071K5L, SnapEDA_Link=https://www.snapeda.com/parts/RC0603FR-071K5L/Yageo/view-part/?ref=snap
R2 R5 R8 R11: library part RC0603FR-0710KL, "10 kOhms ±1% 0.1W, 1/10W Chip Resistor 0603 (1608 Metric) Moisture Resistant Thick Film", Package="0603-2 YAGEO", Check_prices=https://www.snapeda.com/parts/RC0603FR0710KL/Yageo/view-part/?ref=eda, MF="Yageo Corporation", MP=RC0603FR0710KL, SnapEDA_Link=https://www.snapeda.com/parts/RC0603FR0710KL/Yageo/view-part/?ref=snap
R3 R6 R9 R12: library part RT1206BRD07400RL, "400 Ohms Â±0.1% 0.25W, 1/4W Chip Resistor 1206 (3216 Metric) - Thin Film", Package="3116 Yageo", Check_prices=https://www.snapeda.com/parts/RT1206BRD07400RL/Yageo/view-part/?ref=eda, MF=Yageo, MP=RT1206BRD07400RL, SnapEDA_Link=https://www.snapeda.com/parts/RT1206BRD07400RL/Yageo/view-part/?ref=snap
R4 R7 R10 R13: library part AC0805FR-1010ML, "10MΩ, ±1%, 125mW, 0805, AEC-Q200", Check_prices=https://www.snapeda.com/parts/AC0805FR-1010ML/Yageo/view-part/?ref=eda, SnapEDA_Link=https://www.snapeda.com/parts/AC0805FR-1010ML/Yageo/view-part/?ref=snap
R14 R15 R16 R17 R18 R19 R20 R21 R22 R23: library part Res3, "Resistor", LatestRevisionDate=29-May-2009, LatestRevisionNote="IPC-7351 Footprint Added.", PackageDescription="Chip Resistor", PackageReference=J1-0603, Published=8-Jun-2000, Publisher="Altium Limited"

## Via types
v1: diameter 0.6, hole 0.3, Top Layer to Bottom Layer, 83 vias
v2: diameter 0.8, hole 0.4, Top Layer to Bottom Layer, 17 vias

## Nets (pads, with @x,y where several pads share a name; then routed paths per layer and width w, separated by ;. In a path a pad name is that pad's centre, name@x,y a point inside that pad or via, vN(x,y) a via of type N, cw(c..) or ccw(c..) an arc to the next point about the centre after c; other vN are vias at no path point)
3V3_HOST: C1.2 C2.2 C25.2 C26.2 FL2.1 FL3.1 J2.1 J2.2 J3.1 J3.2 R1.1 R14.2 R15.2 R16.2 R17.2 TP5.1 | length 86.8
  Top Layer w0.25: v1(53.594,12.573) 56.359,12.573 v1(57.248,13.462) ; v1(53.594,14.732) 54.864,13.462 v1(57.248,13.462) ; v1(53.594,16.383) 54.327,16.383 v1(57.248,13.462) ; J2.2 63.504,34 63.627,34 66.675,30.952 v1(66.675,11.811) 66.675,10.451 R1.1
  Top Layer w0.4: v1(46.724,39.878) C25.2 46.724,43.26 C26.2@47.406,43.942 ; J3.2 J3.1 47.058,44.29 C26.2@47.406,43.942 ; C26.2 C26.2@47.406,43.942
  Bottom Layer w0.25: v1(49.403,28.321) 49.403,27.195 FL2.1 ; R15.2 52.322,12.573 v1(53.594,12.573) ; R17.2 53.372,16.51 53.499,16.383 v1(53.594,16.383) ; R16.2 52.387,14.732 v1(53.594,14.732) ; v1(57.248,13.462) 58.899,11.811 v1(66.675,11.811) ; TP5.1 61.087,38.388 61.627,37.848 61.627,34.131 J2.1
  Bottom Layer w0.4: v1(50.419,35.179) R14.2 50.463,34.068 52.534,34.068 FL3.1 55.097,34.112 55.464,33.745 57.404,33.745 C2.2 ; v2(55.88,37.211) v2(59.817,37.211) ; J2.1 60.992,33.496 57.918,33.496 57.902,33.512 57.902,33.745 C2.2@57.786,33.629 ; J2.1@61.627,34 61.631,34.004 J2.2 ; C2.2 C2.2@57.786,33.629 ; C2.2 C2.2@57.786,33.629
3V3_IO_FILT: B1.1 B2.1 C16.2 C22.2 FL3.2 R18.1 R21.1 | length 33.4
  Top Layer w0.25: v1(41.53,25.654) R21.1 R18.1 41.53,30.608 44.704,33.782 v1(44.704,36.195)
  Bottom Layer w0.25: v1(41.53,25.654) 42.616,25.654 48.892,19.378 48.892,19.328 49.167,19.053 C16.2 49.097,18.933 B2.1 ; v1(44.704,36.195) 44.708,36.199 46.771,36.199 B1.1 47.4,36.203 47.6,36.403 47.7,36.403 47.746,36.449 49.341,36.449 C22.2 51.013,36.511 52.548,34.976 FL3.2
3V3_ISO: B1.20 B2.16 C3.2 C4.2 C6.2 C7.2 C9.2 C10.2 C12.2 C13.2 C15.2 C23.2 FL1.2 IC1.2 IC1.3 IC2.2 IC2.3 IC3.2 IC3.3 IC4.2 IC4.3 R2.2 R5.2 R8.2 R11.2 R19.2 R20.2 R24.1 TP7.1 | length 54.8
  Top Layer w0.25: R5.2 v1(31.369,18.542) ; R8.2 30.296,30.48 v1(30.324,30.452) ; R11.2 28.558,42.545 30.082,41.021 v1(30.099,41.021) ; R2.2 v1(28.675,5.107) v1@28.702,5.08 ; R19.2 v1(35.04,30.734)
  Top Layer w0.3: IC1.3 17.608,8.057 19.248,8.057 v1(19.304,8.001) ; IC1.2 18.805,8.763 19.304,9.262 v1(19.304,9.271) ; IC2.3 17.627,20.038 18.549,20.038 18.591,19.996 19.247,19.996 v1(19.304,19.939) ; IC2.2 17.627,20.838 18.732,20.838 v1(19.304,21.41) ; IC3.3 17.607,32.059 19.249,32.059 v1(19.304,32.004) ; IC3.2 17.627,32.838 18.787,32.838 19.223,33.274 v1(19.304,33.274) ; IC4.3 17.574,44.091 19.155,44.091 v1(19.177,44.069) ; IC4.2 18.855,44.763 v1(19.177,45.085)
  Top Layer w0.4: v2(38.1,40.513) 41.005,37.608 R24.1
  Bottom Layer w0.25: v1(19.304,19.939) 19.319,19.924 20.408,19.924 C7.2 ; v1(19.304,21.41) C6.2 ; FL1.2 29.689,27.686 30.324,28.321 v1(30.861,28.321) ; v1(32.385,12.7) 34.346,12.7 R20.2 ; v1(35.433,20.955) 34.866,20.388 C15.2 35.048,18.933 B2.16
  Bottom Layer w0.3: v1(19.177,44.069) C13.2 ; v1(19.177,45.085) 19.569,45.477 20.459,45.477 C12.2 ; v1(19.304,8.001) C4.2 ; v1(19.304,9.271) 19.364,9.271 19.618,9.525 C3.2 ; v1(19.304,32.004) C10.2 ; v1(19.304,33.274) 19.364,33.274 19.618,33.528 C9.2
  Bottom Layer w0.4: v1(35.182,37.545) C23.2 35.317,36.203 B1.20 37.338,36.216 TP7.1
3V3_VDD_FILT: B1.9 C19.2 C21.2 C24.2 FL2.2 | length 7.8
  Bottom Layer w0.25: B1.9 46.847,25.971 48.316,25.971 C21.2 49.73,25.9 C19.2 C24.2@51.573,25.846 ; FL2.2 50.284,27.148 50.429,27.003 50.501,27.003 51.625,25.879 C24.2@51.821,25.879 ; C24.2@51.573,25.931 51.77,25.734 C24.2 C24.2@51.873,25.931
CH1_A_FORCE: IC1.8 IC1.9 J1.12 | length 15.8
  Top Layer w0.25: IC1.9 17.563,4.202 19.275,4.202 19.645,4.572 v1(19.685,4.572) 19.59,4.572 19.299,4.863 IC1.8 IC1.9
  Bottom Layer w0.25: J1.12 19.209,4.191 19.59,4.572 v1(19.685,4.572)
CH1_A_SENSE: C5.2 IC1.10 J1.11 R4.2 | length 14.2
  Top Layer w0.25: J1.11 10.877,8.001 12.82,6.058 R4.2 13.28,6.058 13.615,5.723 13.615,4.633 14.685,3.563 IC1.10 17.652,3.463 18.62,3.463 20.255,1.828 C5.2
CH1_B_RETURN: C5.1 IC1.11 IC1.12 J1.10 | length 22.9
  Top Layer w0.25: v1(21.844,3.556) 21.842,3.554 21.842,1.83 C5.1 21.845,1.828 23.48,3.463 ; IC1.11 24.448,3.463 23.48,3.463 ; IC1.12 23.921,4.213 23.48,3.773 23.48,3.463
  Bottom Layer w0.25: J1.10 13.97,11.811 21.807,3.974 21.807,3.593 v1(21.844,3.556)
CH2_A_FORCE: IC2.8 IC2.9 J1.9 | length 16.4
  Top Layer w0.25: v1(19.875,16.447) v1@19.781,16.447 ; v1@19.781,16.447 19.547,16.213 IC2.9 IC2.8 19.364,16.863 v1@19.781,16.447
  Bottom Layer w0.25: J1.9 19.05,15.621 v1(19.875,16.447)
CH2_A_SENSE: C8.2 IC2.10 J1.8 R7.2 | length 13.9
  Top Layer w0.25: J1.8 11.447,19.431 12.82,18.058 R7.2 13.28,18.058 13.615,17.723 13.615,16.633 14.685,15.563 IC2.10 17.652,15.463 18.62,15.463 20.255,13.828 C8.2
CH2_B_RETURN: C8.1 IC2.11 IC2.12 J1.7 | length 22.5
  Top Layer w0.25: C8.1 21.842,13.83 21.842,15.619 v1(21.844,15.621) ; C8.1@21.845,13.828 23.48,15.463 ; IC2.11 24.448,15.463 23.48,15.463 ; IC2.12 23.921,16.213 23.48,15.773 23.48,15.463
  Bottom Layer w0.25: J1.7 14.224,23.241 v1(21.844,15.621)
CH3_A_FORCE: IC3.8 IC3.9 J1.6 | length 16.1
  Top Layer w0.25: IC3.8@17.478,28.88 17.495,28.863 IC3.8 ; v1(19.618,28.575) v1@19.584,28.575 ; IC3.8 19.236,28.863 19.524,28.575 v1@19.584,28.575 ; IC3.8 IC3.9 19.222,28.213 v1@19.584,28.575
  Bottom Layer w0.25: J1.6 18.094,27.051 v1(19.618,28.575)
CH3_A_SENSE: C11.2 IC3.10 J1.5 R10.2 | length 13.7
  Top Layer w0.25: J1.5 9.468,30.861 10.271,30.058 R10.2 13.28,30.058 13.615,29.723 13.615,28.633 14.685,27.563 IC3.10 17.652,27.463 18.62,27.463 20.255,25.828 C11.2
CH3_B_RETURN: C11.1 IC3.11 IC3.12 J1.4 | length 22.3
  Top Layer w0.25: v1(21.844,27.686) 21.842,27.684 21.842,25.83 C11.1 21.845,25.828 23.48,27.463 ; IC3.11 24.448,27.463 23.48,27.463 ; IC3.12 23.921,28.213 23.48,27.773 23.48,27.463
  Bottom Layer w0.25: J1.4 14.859,34.671 v1(21.844,27.686)
CH4_A_FORCE: IC4.8 IC4.9 J1.3 | length 15.9
  Top Layer w0.25: v1(19.55,40.513) v1@19.455,40.513 ; v1@19.455,40.513 19.155,40.213 IC4.9 IC4.8 19.105,40.863 v1@19.455,40.513
  Bottom Layer w0.25: J1.3 17.518,38.481 v1(19.55,40.513)
CH4_A_SENSE: C14.2 IC4.10 J1.2 R13.2 | length 13.5
  Top Layer w0.25: J1.2 12.817,42.291 R13.2 13.28,42.058 13.615,41.723 13.615,40.633 14.685,39.563 IC4.10 17.652,39.463 18.62,39.463 20.255,37.828 C14.2
CH4_B_RETURN: C14.1 IC4.11 IC4.12 J1.1 | length 22
  Top Layer w0.25: v1(21.844,39.497) 21.842,39.495 21.842,37.83 C14.1 21.845,37.828 23.48,39.463 ; IC4.11 24.448,39.463 23.48,39.463 ; IC4.12 23.921,40.213 23.48,39.773 23.48,39.463
  Bottom Layer w0.25: J1.1 15.24,46.101 v1(21.844,39.497)
CS1: B2.12 IC1.16 R2.1 TP14.1 | length 25
  Top Layer w0.25: IC1.16 26.996,6.813 R2.1 27.215,6.604 27.6,6.989 27.6,6.999 27.83,7.229 27.83,7.249 34.417,13.836 v1(34.417,13.843) 35.306,12.954 35.306,7.493 36.83,5.969 TP14.1
  Bottom Layer w0.25: v1(34.417,13.843) 34.422,13.848 37.32,13.848 B2.12
CS1_N_HOST: B2.5 J2.17 J3.12 R15.1 | length 63.4
  Bottom Layer w0.25: B2.5 47.425,13.853 48.695,12.583 R15.1 ; R15.1@50.812,12.683 51.982,13.853 55.509,13.853 56.388,14.732 58.359,14.732 ; J3.12 59.774,48.752 60.849,48.752 67.564,42.037 67.564,16.891 65.405,14.732 58.359,14.732 ; J2.17 61.5,17.873 58.359,14.732
CS2: B2.13 IC2.16 R5.1 TP15.1 | length 27.2
  Top Layer w0.25: IC2.16 26.807,18.813 R5.1 27.088,18.542 27.703,17.927 27.703,17.897 29.852,15.748 v1(33.401,15.748) 33.437,15.712 33.819,15.712 35.941,13.59 35.941,9.906 39.156,6.691 39.156,6.657 39.624,6.189 TP15.1
  Bottom Layer w0.25: v1(33.401,15.748) 34.031,15.118 37.32,15.118 B2.13
CS2_N_HOST: B2.4 J2.15 J3.11 R16.1 | length 63.6
  Layer 1 w0.25: J3.11 67.183,38.803 67.183,17.272 64.135,14.224 61.214,14.224 59.817,15.621 59.817,18.19 61.5,19.873 J2.15
  Bottom Layer w0.25: B2.4 47.425,15.123 47.625,14.923 47.625,14.878 47.771,14.732 50.741,14.732 R16.1 50.814,14.905 51.039,15.13 51.069,15.13 51.56,15.621 57.248,15.621 61.5,19.873 J2.15
CS3: B2.14 IC3.16 R8.1 TP16.1 | length 35.7
  Top Layer w0.25: IC3.16 26.745,30.813 R8.1 27.05,30.452 27.05,24.893 v1(35.56,16.383) 36.645,15.298 36.645,10.98 41.91,5.715 TP16.1
  Bottom Layer w0.25: v1(35.56,16.383) 35.565,16.388 37.32,16.388 B2.14
CS3_N_HOST: B2.3 J2.13 J3.9 R17.1 | length 43.2
  Layer 1 w0.25: J3.9 57.218,26.409 61.5,22.127 J2.13
  Bottom Layer w0.25: B2.3 50.695,16.393 R17.1 50.812,16.61 52.363,18.161 57.788,18.161 61.5,21.873 J2.13
CS4: B1.17 IC4.16 R11.1 TP17.1 | length 51.1
  Top Layer w0.25: IC4.16 26.81,42.813 R11.1 27.088,42.545 27.473,42.16 27.473,41.488 34.75,34.211 v1(34.75,32.393) ; v1(38.989,32.258) 38.989,26.035 47.117,17.907 47.117,7.874 TP17.1
  Bottom Layer w0.25: v1(34.75,32.393) B1.17 38.854,32.393 v1(38.989,32.258)
CS4_N_HOST: B1.4 J2.9 J3.7 R14.1 | length 34.9
  Top Layer w0.25: v1(50.419,31.356) 50.419,31.268 55.687,26 61.496,26 J2.9
  Layer 1 w0.25: v1(50.419,31.356) 54.678,35.615 J3.7
  Bottom Layer w0.25: B1.4 46.84,32.458 50.354,32.458 R14.1 v1(50.419,31.356)
GND1_PWR: B1.10 C19.1 C21.1 C24.1 FL5.2 | length 14.4
  Bottom Layer w0.25: B1.10 46.838,24.837 48.324,24.837 C21.1 48.387,24.85 48.599,24.638 49.592,24.638 50.771,23.459 51.573,23.459 C24.1@51.998,23.034 ; FL5.2 52.364,28.194 53.975,26.583 53.975,23.18 53.829,23.034 52.455,23.034 C24.1
GND2_RAW: B1.11 B1.13 C17.1 C18.1 C20.1 FL4.1 TP9.1 | length 37.3
  Bottom Layer w0.25: TP9.1 29.659,8.763 FL4.1 32.026,24.028 C17.1 32.431,23.923 33.068,24.56 34.277,24.56 34.565,24.848 35.435,24.848 35.435,24.725 35.56,24.85 C20.1 35.624,24.837 37.262,24.837 B1.11 37.525,24.973 38.308,24.973 38.989,25.654 38.989,26.416 38.292,27.113 37.525,27.113 B1.13
GND_HOST: B1.6 B2.2 B2.8 C1.1 C2.1 C16.1 C22.1 C25.1 C26.1 D1.1 FL5.1 J2.3 J2.4 J3.3 J3.4 TP8.1 | length 124.3
  Top Layer w0.25: C25.1 C25.1@49.805,42.291
  Top Layer w0.4: C26.1 C26.1@48.996,43.942 ; v1(49.022,10.033) 50.546,11.557 62.506,11.557 ; C25.1 49.424,43.509 49.336,43.597 49.336,43.602 C26.1@48.996,43.942 ; J3.4 J3.3 49.336,45.966 49.336,44.282 C26.1@48.996,43.942 ; C25.1@49.805,42.291 v1(51.054,42.291) ; v1(50.673,17.653) 56.769,17.653 62.686,11.736 ; D1.1 61.425,10.476 61.625,10.676 62.506,11.557 ; J2.4 63.504,32 63.627,32 63.681,32 65.278,30.403 65.278,14.329 62.686,11.736 ; 62.506,11.557 62.686,11.736
  Layer 1 w0.25: J3.3 J3.4
  Layer 1 w0.4: J2.3 J2.4
  Bottom Layer w0.25: B2.8 46.78,10.038 49.017,10.038 v1(49.022,10.033) ; v1(48.006,39.243) 48.021,39.243 49.353,37.911 C22.1 ; C16.1@49.207,17.663 C16.1 ; J2.4 63.504,32 63.627,32 65.024,33.397 65.024,37.465 TP8.1
  Bottom Layer w0.4: B2.2 C16.1@49.207,17.663 ; B1.6 50.864,29.853 51.659,29.058 FL5.1 52.555,29.058 54.853,31.356 C1.1 55.503,31.706 57.443,31.706 C2.1 ; C16.1 v1(50.673,17.653) ; v2(52.138,43.561) v2(52.138,39.497) v2(55.88,39.497) 55.915,39.532 56.804,39.532 v2(59.563,42.291) ; v2(55.88,35.56) v2(59.563,35.56) ; C2.1@57.681,31.916 57.725,31.96 61.456,31.96 J2.3 ; v2(60.833,43.434) v2(62.611,45.212) ; J2.3@61.627,32 61.631,32.004 J2.4 ; v2@61.849,42.608 61.912,42.608 v2(63.627,44.323) ; v2@62.992,41.592 64.643,43.243 v2(64.643,43.307)
  other v2: 62.992,41.529 61.849,42.545
GND_ISO: B1.15 B2.9 B2.15 C3.1 C4.1 C6.1 C7.1 C9.1 C10.1 C12.1 C13.1 C15.1 C23.1 D2.1 FL4.2 IC1.13 IC1.18 IC1.19 IC2.13 IC2.18 IC2.19 IC3.13 IC3.18 IC3.19 IC4.13 IC4.18 IC4.19 TP10.1 | length 71.9
  Top Layer w0.25: IC1.13 26.346,4.863 v1(26.996,4.213) ; IC2.13 24.648,16.763 25.535,16.763 26.289,16.009 v1(26.289,13.83) ; IC3.13 25.874,28.863 v1(26.289,28.448) ; IC4.13 25.755,40.863 v1(26.405,40.213) ; v1(26.289,9.017) 26.035,8.763 25.781,8.763 ; v1(26.728,33.164) 26.289,32.724 ; v1(26.807,21.413) 26.157,20.763 ; v1(26.81,45.413) 26.639,45.243 26.639,45.24 26.162,44.763 ; 25.781,8.763 25.781,8.719 25.175,8.113 IC1.18 IC1.19 25.781,8.763 ; 26.157,20.763 25.607,20.213 24.648,20.213 IC2.18 IC2.19 26.157,20.763 ; 26.162,44.763 IC4.19 IC4.18 24.648,44.213 25.612,44.213 26.162,44.763 ; 26.289,32.724 26.25,32.763 IC3.19 24.548,32.729 24.553,32.724 24.553,32.118 IC3.18 25.678,32.113 26.289,32.724
  Top Layer w0.4: v2(34.29,39.624) 35.975,37.939 35.975,35.69 37.935,33.73 D2.1
  Bottom Layer w0.25: v1(20.955,42.672) 20.955,43.03 21.994,44.069 C13.1 22.025,44.095 22.025,45.462 C12.1 ; v1(21.463,18.796) 21.737,19.07 21.737,19.645 C7.1 C6.1 v1(22.002,22.733) ; v1(21.463,30.813) 21.53,30.88 21.715,30.88 21.999,31.164 C9.1 v1(21.999,34.671) ; v1(21.59,6.604) 21.999,7.013 C4.1 C3.1 v1(21.999,10.795) ; v1(22.05,46.736) C12.1 ; C12.1@22.115,45.436 22.063,45.488 C12.1 ; FL4.2 29.788,25.021 29.788,25.364 v1(30.324,25.9) ; v1(33.782,9.525) 34.3,10.043 B2.9
  Bottom Layer w0.4: v1(32.385,28.321) 33.555,29.491 36.341,29.491 36.575,29.725 36.575,29.728 36.7,29.853 B1.15 ; v1(33.02,17.663) 34.814,17.663 C15.1 34.918,17.663 B2.15 ; v2(33.071,37.672) 33.782,36.961 C23.1
MOSI: J2.7 J3.10 R23.2 | length 27.9
  Top Layer w0.25: R23.2 56.447,28 56.451,28.004 J2.7
  Layer 2 w0.25: J3.10 58.42,47.566 58.42,31.207 61.5,28.127 J2.7
NetB1_7: B1.7 R18.2 | length 3.8
  Top Layer w0.25: R18.2 44.458,28.742 44.617,28.583 v1(44.712,28.583)
  Bottom Layer w0.25: v1@44.704,28.575 v1(44.712,28.583) B1.7
NetB1_8: B1.8 R21.2 | length 3.8
  Top Layer w0.25: R21.2 43.101,27.313 v1(44.712,27.313)
  Bottom Layer w0.25: v1(44.712,27.313) B1.8
NetB1_14: B1.14 R19.1 | length 4.4
  Top Layer w0.25: R19.1 33.54,29.391 34.543,28.388 34.973,28.388 v1(35.04,28.321)
  Bottom Layer w0.25: v1(35.04,28.321) 36.438,28.321 36.7,28.583 B1.14
NetB2_10: B2.10 R20.1 | length 3
  Bottom Layer w0.25: R20.1 34.421,11.251 37.263,11.251 B2.10
NetD1_2: D1.2 R1.2 | length 2.2
  Top Layer w0.25: D1.2 R1.2
NetD2_2: D2.2 R24.2 | length 1.7
  Top Layer w0.4: D2.2 R24.2
NetIC1_1: IC1.1 TP1.1 | length 2.4
  Top Layer w0.25: IC1.1 17.608,9.469 TP1.1
NetIC1_4: IC1.4 IC1.5 R3.1 R4.1 | length 7.8
  Top Layer w0.25: R4.1 R3.1 ; IC1.5 16.325,6.813 15.79,7.348 15.79,7.608 R3.1@15.43,7.968 ; IC1.4 17.452,7.563 16.565,7.563 16.16,7.968 R3.1@15.43,7.968 ; R3.1 R3.1@15.43,7.968 ; R3.1 R3.1@15.43,7.968
NetIC1_6: IC1.6 IC1.7 R3.2 | length 5.5
  Top Layer w0.25: R3.2 R3.2@15.43,5.008 ; IC1.7 17.452,5.413 16.565,5.413 16.16,5.008 R3.2@15.43,5.008 ; IC1.6 16.325,6.163 15.79,5.628 15.79,5.368 R3.2@15.43,5.008
NetIC2_1: IC2.1 TP2.1 | length 2.2
  Top Layer w0.25: IC2.1 TP2.1
NetIC2_4: IC2.4 IC2.5 R6.1 R7.1 | length 7.5
  Top Layer w0.25: R7.1 R6.1 R6.1@15.43,19.968 ; IC2.5 16.325,18.813 16.144,18.994 16.144,19.254 R6.1@15.43,19.968 ; IC2.4 17.452,19.563 16.565,19.563 16.375,19.753 16.375,19.822 16.228,19.968 R6.1@15.43,19.968
NetIC2_6: IC2.6 IC2.7 R6.2 | length 5.5
  Top Layer w0.25: R6.2 R6.2@15.43,17.008 ; IC2.7 17.492,17.453 16.505,17.453 16.144,17.092 15.514,17.092 R6.2@15.43,17.008 ; IC2.6 16.325,18.163 15.79,17.628 15.79,17.368 R6.2@15.43,17.008
NetIC3_1: IC3.1 TP3.1 | length 2.1
  Top Layer w0.25: IC3.1 TP3.1
NetIC3_4: IC3.4 IC3.5 R9.1 R10.1 | length 7.5
  Top Layer w0.25: R10.1 R9.1@15.43,31.968 ; IC3.5 16.325,30.813 16.003,31.134 15.79,31.348 15.79,31.608 R9.1@15.43,31.968 ; IC3.4 17.452,31.563 16.565,31.563 16.16,31.968 R9.1@15.43,31.968
NetIC3_6: IC3.6 IC3.7 R9.2 | length 5.6
  Top Layer w0.25: R9.2 15.24,29.198 15.62,29.198 15.79,29.368 15.79,29.51 16.443,30.163 IC3.6 ; R9.2@15.24,29.092 16.144,29.092 16.505,29.453 17.492,29.453 IC3.7
NetIC4_1: IC4.1 TP4.1 | length 2.2
  Top Layer w0.25: IC4.1 17.574,45.435 TP4.1
NetIC4_4: IC4.4 IC4.5 R12.1 R13.1 | length 7.5
  Top Layer w0.25: R13.1 R12.1 R12.1@15.43,43.968 ; IC4.5 16.325,42.813 15.956,43.181 15.79,43.348 15.79,43.608 R12.1@15.43,43.968 ; IC4.4 17.452,43.563 16.565,43.563 16.16,43.968 R12.1@15.43,43.968
NetIC4_6: IC4.6 IC4.7 R12.2 | length 5.5
  Top Layer w0.25: R12.2 R12.2@15.43,41.008 ; IC4.7 17.452,41.413 16.37,41.413 16.117,41.161 15.583,41.161 R12.2@15.43,41.008 ; IC4.6 16.325,42.163 15.79,41.628 15.79,41.368 R12.2@15.43,41.008
SCLK: J2.5 J3.6 R22.2 | length 26
  Top Layer w0.25: J3.6 53.491,47.416 53.491,32.716 56.206,30 R22.2@56.4,30 ; R22.2 R22.2@56.4,30 ; J2.5 56.404,30.004 R22.2@56.4,30
SPI_MISO: B1.16 IC1.17 IC2.17 IC3.17 IC4.17 TP13.1 | length 86
  Top Layer w0.25: IC1.17 26.513,7.463 28.154,9.104 28.154,9.739 v1(28.194,9.779) ; IC2.17 24.648,19.563 27.183,19.563 v1(28.194,20.574) ; IC3.17 24.565,31.48 35.671,31.48 v1(35.687,31.496) 35.687,35.052 34.29,36.449 34.29,38.293 30.724,41.859 29.12,43.463 IC4.17 ; v1(40.767,32.385) 40.767,33.22 43.18,35.633 TP13.1
  Bottom Layer w0.25: v1(28.194,9.779) v1(28.194,20.574) 28.194,27.305 32.385,31.496 v1(35.687,31.496) 36.06,31.123 39.505,31.123 v1(40.767,32.385)
SPI_MISO_HOST: B1.5 J2.11 J3.8 | length 38.3
  Top Layer w0.25: v1(48.83,31.115) 55.945,24 61.496,24 J2.11
  Layer 1 w0.25: v1(48.83,31.115) 48.205,31.74 48.205,37.231 53.467,42.493 53.467,47.557 J3.8
  Bottom Layer w0.25: B1.5 48.822,31.123 v1(48.83,31.115)
SPI_MOSI: B1.18 IC1.14 IC2.14 IC3.14 IC4.14 TP12.1 | length 79.5
  Top Layer w0.25: IC1.14 v1(26.035,5.513) ; IC2.14 26.022,17.513 v1(26.035,17.526) ; IC3.14 v1(26.01,29.513) ; IC4.14 24.648,41.413 26.405,41.413 32.639,35.179 v1(32.639,33.663)
  Bottom Layer w0.25: v1(26.01,29.513) 28.448,29.513 ; v1(26.035,5.513) 27.432,6.91 27.432,28.497 ; v1(26.035,17.526) 26.035,27.1 27.432,28.497 ; TP12.1 40.259,35.972 37.95,33.663 B1.18 v1(32.639,33.663) 32.598,33.663 28.448,29.513 ; 27.432,28.497 28.448,29.513
SPI_MOSI_HOST: B1.3 R23.1 | length 10.3
  Top Layer w0.25: v1@48.831,33.663 49.284,33.663 54.428,28.519 54.528,28.519 54.753,28.294 R23.1
  Bottom Layer w0.25: B1.3 v1(48.83,33.663)
SPI_SCLK: B1.19 IC1.15 IC2.15 IC3.15 IC4.15 TP11.1 | length 70.9
  Top Layer w0.25: v1(22.098,42.163) IC4.15 ; v1(22.987,6.091) 23.023,6.127 24.512,6.127 IC1.15 ; v1(22.987,18.161) v1(22.987,18.161) 24.547,18.162 IC2.15 ; v1(22.987,30.226) 23.019,30.194 24.517,30.194 IC3.15
  Bottom Layer w0.25: v1(22.098,42.163) 29.328,34.933 ; v1(22.987,6.091) v1(22.987,18.161) 22.987,31.242 26.678,34.933 29.328,34.933 ; TP11.1 39.243,43.18 39.243,36.226 37.95,34.933 B1.19 29.328,34.933
SPI_SCLK_HOST: B1.2 R22.1 | length 10.1
  Top Layer w0.25: v1(48.83,34.99) 48.867,34.953 49.248,34.953 54.174,30.027 54.579,30.027 R22.1
  Bottom Layer w0.25: B1.2 46.803,34.961 48.802,34.961 v1(48.83,34.99)
VISOOUT_RAW: B1.12 C17.2 C18.2 C20.2 FL1.1 TP6.1 | length 34.5
  Bottom Layer w0.25: TP6.1 29.034,6.848 29.034,26.197 29.484,26.647 29.484,26.677 29.629,26.822 31.932,26.822 C17.2 33.59,26.623 34.24,25.973 C18.2 34.363,25.9 C20.2 35.632,25.971 37.253,25.971 B1.12
pads on no net: B2.6 B2.7 B2.11 IC1.20 IC2.20 IC3.20 IC4.20 J2.6 J2.8 J2.10 J2.12 J2.14 J2.16 J2.18 J2.19 J2.20 J3.5

## Polygon pours and split planes (outlines as drawn)
GND_HOST on Layer 1 "GND_HOST_L02_P002" (solid, remove dead copper, pour order 2): 44.45,49.377 44.45,22.727 46.566,20.612 46.502,20.548 46.502,1.752 68.453,1.752 68.453,49.377
GND_ISO on Layer 1 "GND_ISO_L02_P004" (solid, remove dead copper, pour order 4): 37.465,49.378 37.465,1.778 12.065,1.778 12.065,49.403
3V3_ISO on Layer 2 "3V3_ISO_L03_P005" (solid, remove dead copper, pour order 5): 38.608,49.403 38.608,1.778 12.065,1.778 12.065,49.403
3V3_HOST on Layer 2 "3V3_HOST_L03_P003" (solid, remove dead copper, pour order 3): 44.45,49.403 44.45,22.606 46.482,20.574 46.482,1.778 67.818,1.778 67.818,49.403

## Keep-outs
Keep-Out Layer:
  the board outline again, w0.254

## Other copper
Layer 1:
  pour cut-out: 66.675,49.403 68.453,47.625 68.453,49.377
  pour cut-out: 44.455,46.893 45.92,48.358 46.068,48.358 46.068,49.216 46.119,49.267 46.009,49.377 44.45,49.377
  pour cut-out: 46.502,6.999 51.689,1.812 51.689,1.752 46.502,1.752
  pour cut-out: 68.453,4.445 65.786,1.778 65.786,1.752 68.453,1.752
  pour cut-out: 46.958,5.518 50.673,1.803 50.673,1.752 46.502,1.752
  pour cut-out: 13.589,1.778 12.065,3.302 12.065,1.778
  pour cut-out: 37.465,8.509 30.734,1.778 37.465,1.778
  pour cut-out: 35.814,49.403 37.465,47.752 37.465,49.378
  pour cut-out: 13.716,49.403 12.065,47.752 12.065,49.403
Layer 2:
  pour cut-out: 44.45,48.387 45.466,49.403 44.45,49.403
  pour cut-out: 66.294,49.403 67.818,47.879 67.818,49.403
  pour cut-out: 67.818,3.81 65.786,1.778 67.818,1.778
  pour cut-out: 46.512,6.99 46.512,6.955 51.689,1.778 46.482,1.778
  pour cut-out: 38.608,9.525 30.861,1.778 38.608,1.778
  pour cut-out: 12.065,4.191 14.478,1.778 12.065,1.778
  pour cut-out: 14.097,49.403 12.065,47.371 12.065,49.403

## Silkscreen, mask and mechanical layers (free items; w line width, h text height)
Top Overlay:
  text "4CH_PT100_INPUT_ISO" at 49.53,6.604 h1.52
  text "2026/08/28 REV1.0" at 49.403,4.699 h1.52
  text "PROTEC.CO.,LTD" at 49.403,2.794 h1.52